# Altium PCB Solar_Tracking_Board.PcbDoc
Units mm, origin at the board's own origin, x right, y up, seen from the top; angles counter-clockwise.
Board outline 53.21 x 68.58 mm, 2 copper layers (F.Cu, B.Cu); 23 components, 40 nets, 78 pads, 9 vias.
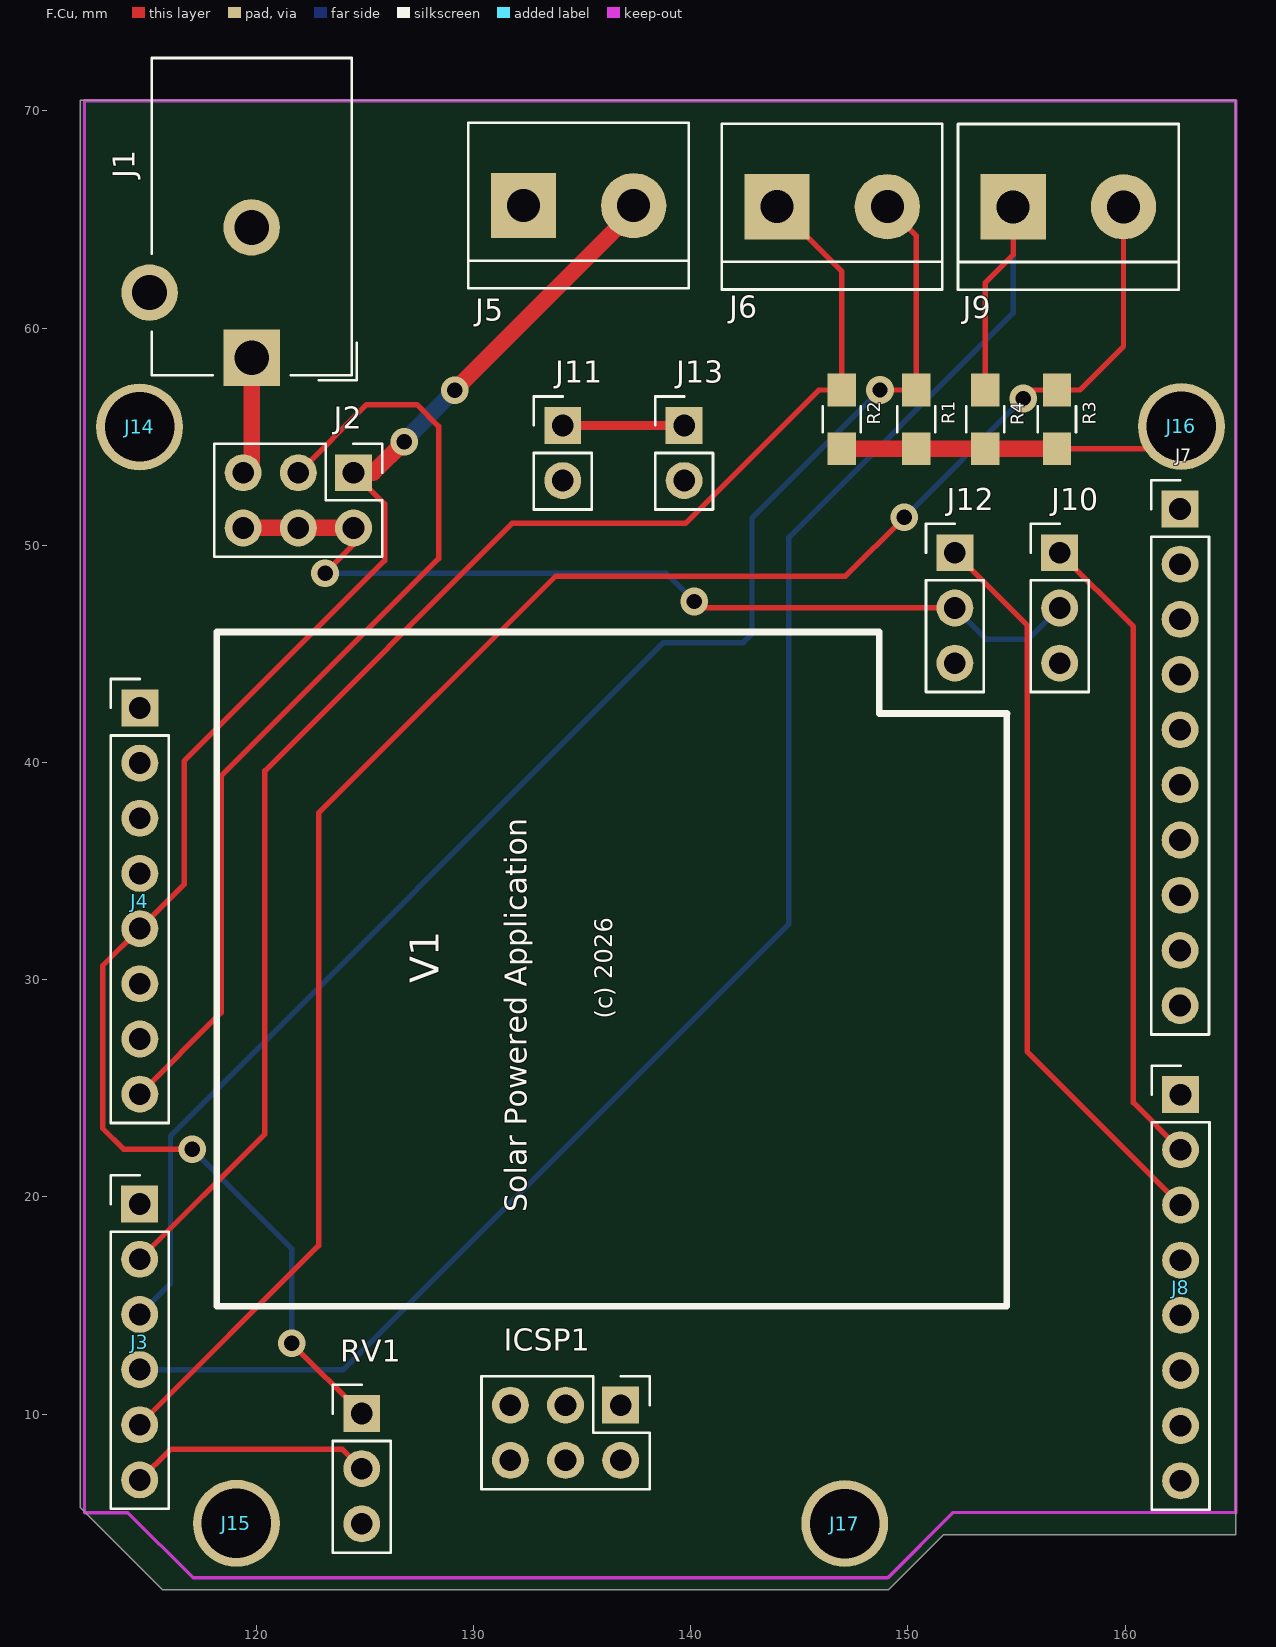
[diagram p0: F.Cu view]
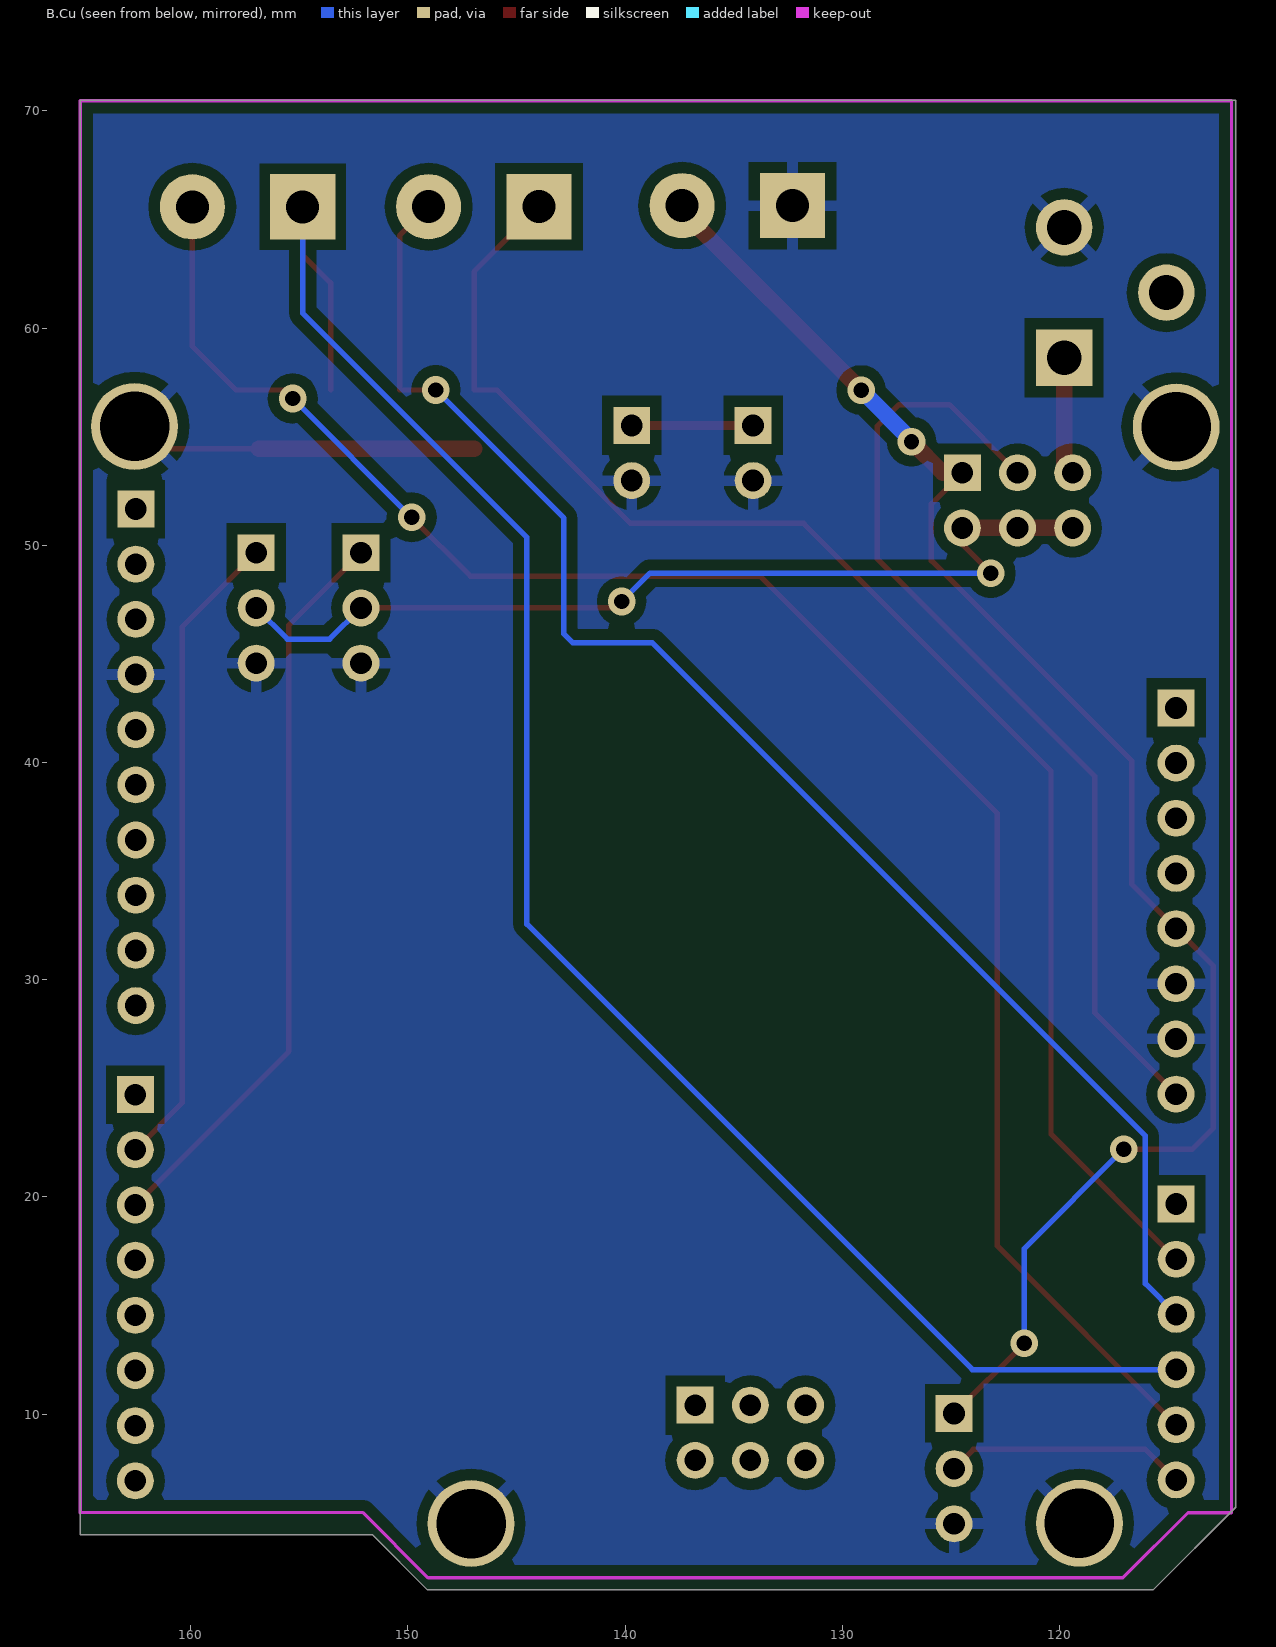
[diagram p1: B.Cu view, seen from below]

## Layer stack, top to bottom
F.Mask: solder mask 0.0102, Solder Resist, Dk 3.5
F.Cu: signal copper 0.0356
Dielectric 1: dielectric 0.32, FR-4, Dk 4.8
B.Cu: signal copper 0.0356
B.Mask: solder mask 0.0102, Solder Resist, Dk 3.5

## Board outline
111.887,5.715 115.697,1.905 149.098,1.905 151.638,4.445 165.1,4.445 165.1,70.485 111.887,70.485

## Design rules (kind name [scope] priority, off if disabled: settings)
Clearance "Clearence 0.508_Polygon" [InNamedPolygon('B.Cu-GND')] p1: gap=0.508 ignorepadtopadclearanceinfootprint=FALSE
Clearance "Clearence 0.254_NetClass" [InNetClass('PWR') OR InNetClass('Signal')] p2: gap=0.254 ignorepadtopadclearanceinfootprint=FALSE
Clearance "Clearence 0.2_NetClass" [InNetClass('Default')] p3: gap=0.2 ignorepadtopadclearanceinfootprint=FALSE
HoleSize "Hole Size (Default)" [All] p1: absolutevalues=TRUE maxlimit=10 minlimit=0.3 maxpercent=80.000 minpercent=20.000
MinimumSolderMaskSliver [All] p1: minsoldermaskwidth=0
PolygonConnect Polygon_B.Cu-GND_ConnectDirect [IsNamedPolygon('B.Cu-GND') vs IsVia] p1: connectstyle=Direct reliefconductorwidth=0.254 reliefentries=4 polygonreliefangle="90 Angle" airgapwidth=0.254
PolygonConnect Polygon_B.Cu-GND_ConnectRelief45 [IsNamedPolygon('B.Cu-GND') vs (IsThruPin or IsSMTPin) and (PadShape_AllLayers = 'Round')] p2: connectstyle=Relief reliefconductorwidth=0.508 reliefentries=4 polygonreliefangle="45 Angle" airgapwidth=0.508
PolygonConnect Polygon_B.Cu-GND_ConnectRelief90 [IsNamedPolygon('B.Cu-GND') vs (IsThruPin or IsSMTPin) and (PadShape_AllLayers <> 'Round')] p3: connectstyle=Relief reliefconductorwidth=0.508 reliefentries=4 polygonreliefangle="90 Angle" airgapwidth=0.508
RoutingVias [All] p1: holewidth=0.711 width=1.27 viastyle="Through Hole" minholewidth=0.711 minwidth=1.27 maxholewidth=0.711 maxwidth=1.27
SilkToSilkClearance [All] p1: silktosilkclearance=0
SilkToSolderMaskClearance [IsPad] p1: minsilkscreentomaskgap=0 clearancetoexposedcopper=TRUE
SolderMaskExpansion [All] p1: expansion=0.102 istentingtop=FALSE
Width [All] p1: maxlimit=10 minlimit=0.2 preferedwidth=0.25 minimp=50.000000 maximp=50.000000 favimp=50.000000
26 further rules are at their usual default settings.

## Classes and differential pairs
net class Default: 0 1 2 3 4 5 6 7 8 9 10 11 12 13 +3V3 +5V A0 A1 A2 A3 A4 A5 AREF Barrel_PWR GND IOREF Net-(ICSP1-Pad1) Net-(ICSP1-Pad2) Net-(ICSP1-Pad3) Net-(ICSP1-Pad4) Net-(ICSP1-Pad5) Net-(ICSP1-Pad6) Net-(J1-Pad3) Net-(J4-Pad1) RESET SCL SDA Servo_PWR SolarPWR_IN Vin

## Components (designator, comment, footprint, x,y, rotation, side; value= is the part's Value field where it differs from the comment)
ICSP1 "Stack-Header_02x03_Odd_Even" Pin_Header_Straight_2x03_Pitch2.54mm 136.779,10.414 r270 top
J1 "Barrel_Jack" Barrel_Jack_CUI_PJ-102AH 119.789,58.635 r180 top
J2 "Conn_02x03_Odd_Even" Pin_Header_Straight_2x03_Pitch2.54mm 124.478,53.34 r270 top
J3 "" Pin_Header_Straight_1x06_Pitch2.54mm 114.635,19.672 r0 top
J4 "Stack-Header_01x08" Pin_Header_Straight_1x08_Pitch2.54mm 114.64,42.514 r0 top
J5 "Screw_Terminal_01x02" TerminalBlock_bornier-2_P5.08mm 132.298,65.638 r0 top
J6 "Screw_Terminal_01x02" TerminalBlock_bornier-2_P5.08mm 143.972,65.59 r0 top
J7 "Stack-Header_01x10" Pin_Header_Straight_1x10_Pitch2.54mm 162.532,51.671 r0 top
J8 "" Pin_Header_Straight_1x08_Pitch2.54mm 162.555,24.711 r0 top
J9 "Screw_Terminal_01x02" TerminalBlock_bornier-2_P5.08mm 154.849,65.585 r0 top
J10 "Conn_01x03" Pin_Header_Straight_1x03_Pitch2.54mm 156.99,49.657 r0 top
J11 "Conn_01x02_Female" Pin_Header_Straight_1x02_Pitch2.54mm 134.112,55.521 r0 top
J12 "Conn_01x03" Pin_Header_Straight_1x03_Pitch2.54mm 152.164,49.657 r0 top
J13 "Conn_01x02_Female" Pin_Header_Straight_1x02_Pitch2.54mm 139.7,55.521 r0 top
J14 "MOUNTING_HOLE" MountingHole_3.2mm_M3_Pad 114.633,55.45 r0 top
J15 "" MountingHole_3.2mm_M3_Pad 119.085,4.975 r0 top
J16 "MOUNTING_HOLE" MountingHole_3.2mm_M3_Pad 162.59,55.471 r0 top
J17 "" MountingHole_3.2mm_M3_Pad 147.094,4.965 r0 top
R1 "10k" R_0805_HandSoldering 150.386,55.8 r270 top
R2 "10k" R_0805_HandSoldering 146.957,55.8 r270 top
R3 "10k" R_0805_HandSoldering 156.863,55.8 r270 top
R4 "10k" R_0805_HandSoldering 153.561,55.8 r270 top
RV1 "POT" Pin_Header_Straight_1x03_Pitch2.54mm 124.859,10.033 r0 top

## Footprints (in the part's own frame and the unit in brackets; to place one, negate y for a bottom-side part, rotate by r counter-clockwise, add the part's x,y. Pads: shape width x height; smd on the part's side, far side on the other; paste and mask are expansions set on the pad)
Barrel_Jack_CUI_PJ-102AH [mm]
  rect 2.6x2.6 hole 1.6 paste-2.6 mask+0.2: 1(0,0)
  round 2.6 hole 1.6 paste-2.6 mask+0.2: 2(0,-6) 3(4.7,-3)
  silkscreen extent -4.84,-13.8 4.6,1.04
MountingHole_3.2mm_M3_Pad [mm]
  round 4 hole 3.2 paste-4 mask+0.2: 1(0,0)
Pin_Header_Straight_1x02_Pitch2.54mm [mm]
  rect 1.7x1.7 hole 1 paste-1.7 mask+0.2: 1(0,0)
  rrect100% 1.7x1.7 hole 1 paste-1.7 mask+0.2: 2(0,-2.54)
  silkscreen extent -1.33,-3.87 1.33,1.33
Pin_Header_Straight_1x03_Pitch2.54mm [mm]
  rect 1.7x1.7 hole 1 paste-1.7 mask+0.2: 1(0,0)
  rrect100% 1.7x1.7 hole 1 paste-1.7 mask+0.2: 2(0,-2.54) 3(0,-5.08)
  silkscreen extent -1.33,-6.41 1.33,1.33
Pin_Header_Straight_1x06_Pitch2.54mm [mm]
  rect 1.7x1.7 hole 1 paste-1.7 mask+0.2: 1(0,0)
  rrect100% 1.7x1.7 hole 1 paste-1.7 mask+0.2: 2(0,-2.54) 3(0,-5.08) 4(0,-7.62) 5(0,-10.16) 6(0,-12.7)
  silkscreen extent -1.33,-14.03 1.33,1.33
Pin_Header_Straight_1x08_Pitch2.54mm [mm]
  rect 1.7x1.7 hole 1 paste-1.7 mask+0.2: 1(0,0)
  rrect100% 1.7x1.7 hole 1 paste-1.7 mask+0.2: 2(0,-2.54) 3(0,-5.08) 4(0,-7.62) 5(0,-10.16) 6(0,-12.7) 7(0,-15.24) 8(0,-17.78)
  silkscreen extent -1.33,-19.11 1.33,1.33
Pin_Header_Straight_1x10_Pitch2.54mm [mm]
  rect 1.7x1.7 hole 1 paste-1.7 mask+0.2: 1(0,0)
  rrect100% 1.7x1.7 hole 1 paste-1.7 mask+0.2: 2(0,-2.54) 3(0,-5.08) 4(0,-7.62) 5(0,-10.16) 6(0,-12.7) 7(0,-15.24) 8(0,-17.78) 9(0,-20.32) 10(0,-22.86)
  silkscreen extent -1.33,-24.19 1.33,1.33
Pin_Header_Straight_2x03_Pitch2.54mm [mm]
  rect 1.7x1.7 hole 1 paste-1.7 mask+0.2: 1(0,0)
  rrect100% 1.7x1.7 hole 1 paste-1.7 mask+0.2: 2(2.54,0) 3(0,-2.54) 4(2.54,-2.54) 5(0,-5.08) 6(2.54,-5.08)
  silkscreen extent -1.33,-6.41 3.87,1.33
R_0805_HandSoldering [mm]
  rect 1.5x1.3 smd mask+0.2: 1(-1.35,0) 2(1.35,0)
  silkscreen extent -0.6,-0.88 0.6,0.88
TerminalBlock_bornier-2_P5.08mm [mm]
  rect 3x3 hole 1.52 paste-3 mask+0.2: 1(0,0)
  round 3 hole 1.52 paste-3 mask+0.2: 2(5.08,0)
  silkscreen extent -2.54,-3.81 7.62,3.81

## Part data
ICSP1 J2: library part Pin_Header_Straight_2x03_Pitch2.54mm, "Through hole straight pin header, 2x03, 2.54mm pitch, double rows"
J1: library part Barrel_Jack_CUI_PJ-102AH, "Thin-pin DC Barrel Jack, https://cdn-shop.adafruit.com/datasheets/21mmdcjackDatasheet.pdf"
J3: library part Pin_Header_Straight_1x06_Pitch2.54mm, "Through hole straight pin header, 1x06, 2.54mm pitch, single row"
J4 J8: library part Pin_Header_Straight_1x08_Pitch2.54mm, "Through hole straight pin header, 1x08, 2.54mm pitch, single row"
J5 J6 J9: library part TerminalBlock_bornier-2_P5.08mm, "simple 2-pin terminal block, pitch 5.08mm, revamped version of bornier2"
J7: library part Pin_Header_Straight_1x10_Pitch2.54mm, "Through hole straight pin header, 1x10, 2.54mm pitch, single row"
J10 J12 RV1: library part Pin_Header_Straight_1x03_Pitch2.54mm, "Through hole straight pin header, 1x03, 2.54mm pitch, single row"
J11 J13: library part Pin_Header_Straight_1x02_Pitch2.54mm, "Through hole straight pin header, 1x02, 2.54mm pitch, single row"
J14 J15 J16 J17: library part MountingHole_3.2mm_M3_Pad, "Mounting Hole 3.2mm, M3"
R1 R2 R3 R4: library part R_0805_HandSoldering, "Resistor SMD 0805, hand soldering"

## Via types
v1: diameter 1.27, hole 0.711, F.Cu to B.Cu, 9 vias

## Nets (pads, with @x,y where several pads share a name; then routed paths per layer and width w, separated by ;. In a path a pad name is that pad's centre, name@x,y a point inside that pad or via, vN(x,y) a via of type N, cw(c..) or ccw(c..) an arc to the next point about the centre after c; other vN are vias at no path point)
0: J8.8
1: J8.7
2: J8.6
3: J8.5
4: J8.4
5: J8.3 J12.1 | length 34.3
  F.Cu w0.25: J12.1 155.489,46.332 155.489,26.698 J8.3
6: J8.2 J10.1 | length 29.8
  F.Cu w0.25: J10.1 160.386,46.261 160.386,24.34 J8.2
7: J8.1
8: J7.10
9: J7.9
10: J7.8
11: J7.7
12: J7.6
13: J7.5
+3V3: J4.4
+5V: J2.1 J4.5 J5.2 RV1.1 | length 74.2
  F.Cu w0.25: v1(117.051,22.199) 113.894,22.199 112.933,23.159 112.933,30.647 J4.5 116.677,34.391 116.677,40.066 125.909,49.297 125.909,51.909 J2.1 ; v1(121.628,13.264) RV1.1
  F.Cu w0.762: J2.1 125.382,53.34 v1(126.82,54.777) ; v1(129.136,57.145) 137.378,65.387 J5.2
  B.Cu w0.25: v1(117.051,22.199) 121.628,17.622 v1(121.628,13.264)
  B.Cu w0.762: v1(126.82,54.777) 126.82,54.828 v1(129.136,57.145)
A0: J3.1
A1: J3.2 J6.1 R2.1 | length 68.4
  F.Cu w0.25: J3.2 120.399,22.895 120.399,39.621 131.785,51.008 139.759,51.008 145.9,57.15 R2.1 146.957,62.606 J6.1
A2: J3.3 J6.2 R1.1 | length 69.5
  F.Cu w0.25: v1(148.717,57.15) R1.1 150.386,64.257 J6.2
  B.Cu w0.25: J3.3 116.053,16.009 116.053,22.809 138.76,45.517 142.418,45.517 142.824,45.923 142.824,51.257 v1(148.717,57.15)
A3: J3.4 J9.1 R4.1 | length 84.7
  F.Cu w0.25: R4.1 153.561,62.085 154.849,63.373 J9.1
  B.Cu w0.25: J3.4 124.015,12.052 144.526,32.563 144.526,50.368 154.849,60.691 J9.1
A4: J3.5 J9.2 R3.1 | length 83.9
  F.Cu w0.25: J3.5 122.878,17.754 122.878,37.668 133.789,48.58 147.124,48.58 v1(149.835,51.29) ; v1(155.303,56.758) 155.694,57.15 R3.1 157.919,57.15 159.929,59.159 J9.2
  B.Cu w0.25: v1(149.835,51.29) v1(155.303,56.758)
A5: J3.6 RV1.2 | length 11.2
  F.Cu w0.25: J3.6 116.045,8.382 123.969,8.382 RV1.2
AREF: J7.3
Barrel_PWR: J1.1 J2.5 | length 5.5
  F.Cu w0.762: J2.5 119.789,53.731 J1.1
GND: J1.2 J4.6 J4.7 J5.1 J7.4 J10.3 J11.2 J12.3 J13.2 J14.1 J15.1 J16.1 J17.1 R1.2 R2.2 R3.2 R4.2 RV1.3 | length 16.1
  F.Cu w0.25: R3.2 161.569,54.45 J16.1
  F.Cu w0.762: R2.2 R1.2 R4.2 R3.2
IOREF: J4.2
Net-(ICSP1-Pad1): ICSP1.1
Net-(ICSP1-Pad2): ICSP1.2
Net-(ICSP1-Pad3): ICSP1.3
Net-(ICSP1-Pad4): ICSP1.4
Net-(ICSP1-Pad5): ICSP1.5
Net-(ICSP1-Pad6): ICSP1.6
Net-(J1-Pad3): J1.3
Net-(J4-Pad1): J4.1
RESET: J4.3
SCL: J7.1
SDA: J7.2
Servo_PWR: J2.2 J2.4 J2.6 J10.2 J12.2 | length 43.4
  F.Cu w0.25: v1(123.167,48.722) 124.478,50.033 J2.2 ; v1(140.166,47.414) 140.464,47.117 J12.2
  F.Cu w0.762: J2.6 J2.4 J2.2
  B.Cu w0.25: v1(123.167,48.722) 138.858,48.722 v1(140.166,47.414) ; J12.2 153.604,45.676 155.55,45.676 J10.2
SolarPWR_IN: J11.1 J13.1 | length 5.6
  F.Cu w0.406: J11.1 J13.1
Vin: J2.3 J4.8 | length 44.6
  F.Cu w0.25: J4.8 118.387,28.481 118.387,39.372 128.397,49.382 128.397,55.478 127.394,56.482 125.08,56.482 J2.3

## Polygon pours and split planes (outlines as drawn)
GND on B.Cu "B.Cu-GND" (solid, remove dead copper, pour order 0): 112.118,70.469 165.067,70.449 165.082,5.466 152.08,5.466 149.103,2.463 117.091,2.474 114.107,5.448 112.103,5.501

## Keep-outs
Edge.Cuts:
  lines w0.15: 112.091,5.466 112.091,70.466 ; 112.091,5.466 114.091,5.466 ; 112.091,5.466 112.091,70.466 ; 112.091,5.466 114.091,5.466 ; 112.091,70.466 165.091,70.466 ; 112.091,70.466 165.091,70.466 ; 114.091,5.466 117.091,2.466 ; 114.091,5.466 117.091,2.466 ; 117.091,2.466 149.081,2.466 152.091,5.476 ; 117.091,2.466 149.091,2.476 152.091,5.476 ; 152.091,5.476 165.091,5.466 ; 152.091,5.476 165.091,5.466 ; 165.091,5.466 165.091,70.466 ; 165.091,5.466 165.091,70.466

## Silkscreen, mask and mechanical layers (free items; w line width, h text height)
F.SilkS:
  lines w0.3: 118.173,46.007 118.179,14.978 ; 118.176,14.975 154.559,14.975 ; 118.176,46.009 148.684,46.009 ; 148.687,42.26 148.687,46.004 ; 148.692,42.258 154.564,42.258 ; 154.562,14.978 154.562,42.253
  text "V1" at 128.397,29.845 h1.32 r90
  text "(c) 2026" at 136.398,28.194 h0.8 r90
  text "Solar Powered Application" at 132.461,19.304 h1 r90
F.CrtYd:
  the board outline again, w0.254